# EAGLE board Arduino Shield Circuit v13 (EAGLE 9.7.0)
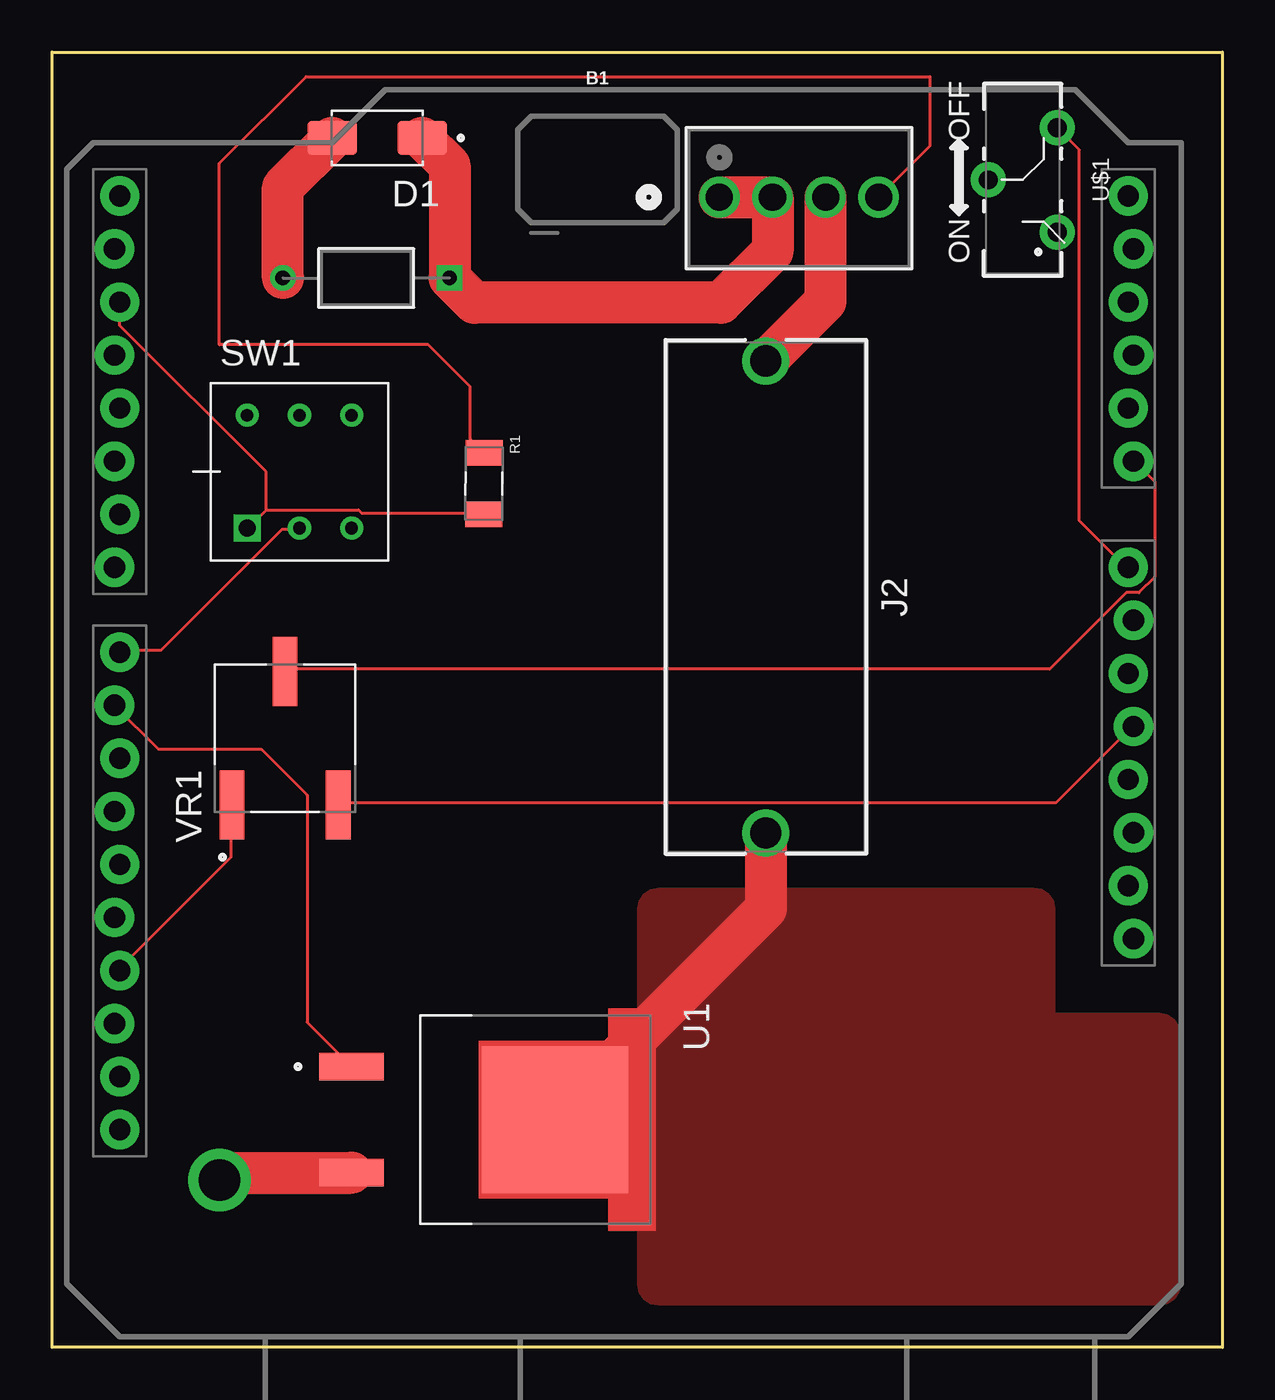
[diagram p0: board, top side]
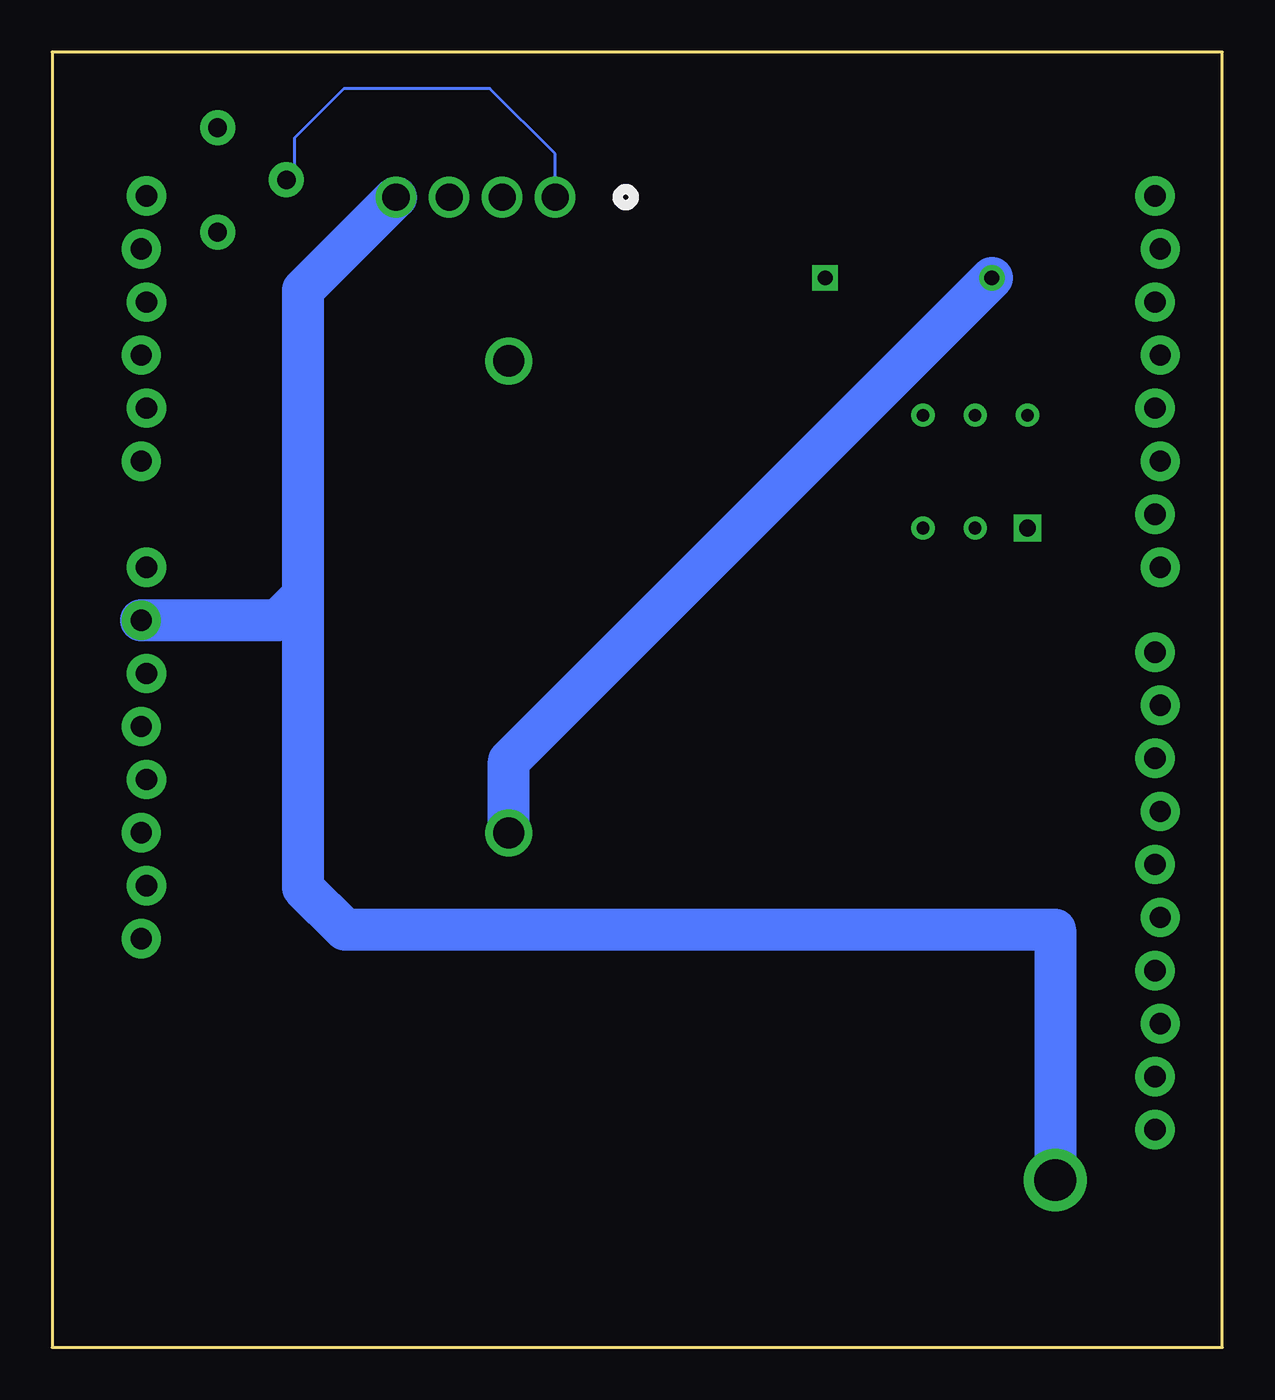
[diagram p1: board, bottom side, seen from below]

Size 56 x 62 mm. Coordinates in mm from the lower left corner, seen from the top.
Outline: 0,62 56,62 56,0 0,0 0,62
Copper layers (1*16): Top / Bottom
Stack-up Default Layer Stack: Top User Defined 0.035mm / Dielectric-1 User Defined 1.5mm / Bottom User Defined 0.035mm
Design rules: minimum copper width 6mil, minimum drill size 0.35mm, copper clearance wire_polygon to wire_polygon 6mil, copper clearance wire_polygon to pad_smd 6mil, copper clearance wire_polygon to via 6mil, copper clearance pad_smd to pad_smd 6mil, copper clearance pad_smd to via 6mil, copper clearance via to via 6mil, copper clearance smd to pad (same net) 6mil, copper clearance smd to via (same net) 6mil, copper clearance smd to smd (same net) 6mil, dimension clearance 40mil, restrict clearance 0mil, drill distance 6mil, keepout clearance 0mil

## Footprints (pad centres in the part's own frame; a part is rotated, then mirrored left to right if it is on the bottom)
UNO_R3_SHIELD_NOLABELS_LOCK = drill 1.016 pad 1.88: 3.3V 24.13,-3.81; 5V 24.384,-1.27; A0 24.384,11.43; A1 24.13,13.97; A2 24.384,16.51; A3 24.13,19.05; A4 24.384,21.59; A5 24.13,24.13; AREF -24.384,-15.494; D2 -24.13,19.05; D3 -24.384,16.51; D4 -24.13,13.97; D5 -24.384,11.43; D6 -24.13,8.89; D7 -24.384,6.35; D8 -24.13,2.286; D9 -24.384,-0.254; D10 -24.13,-2.794; D11 -24.384,-5.334; D12 -24.13,-7.874; D13 -24.384,-10.414; GND@0 24.13,1.27; GND@1 24.384,3.81; GND@2 -24.13,-12.954; IOREF 24.13,-8.89; NC 24.384,-11.43; RES 24.384,-6.35; RX -24.13,24.13; SCL -24.13,-20.574; SDA -24.13,-18.034; TX -24.384,21.59; VIN 24.13,6.35
CAP_SA10_AVX = drill 0.711 pad 1.219 square: 1 0,0 | drill 0.711 pad 1.219: 2 7.976,0
DIOM5226X295N = smd 2.36 x 1.61: A 2.155,0; C -2.155,0
696108003002 = drill 1.5: 1 -11.3,0; 2 11.3,0
CONN_OSTVN04A150_OST = drill 1.295 pad 1.803: 1 0,0; 2 2.54,0; 3 5.08,0; 4 7.62,0
RESC3216X70N = smd 1.23 x 1.77: 1 -1.466,0; 2 1.466,0
TL2201EEZB = drill 0.8 square: P$1 -2.5,-2.7 | drill 0.6: P$2 0,-2.7; P$3 2.5,-2.7; P$4 -2.5,2.7; P$5 0,2.7; P$6 2.5,2.7
TRANS_PSMN4R8-100BSE = smd 1.3 x 3.1: 1 -2.54,-6.4; 3 2.54,-6.4 | smd 7 x 7: 2 0,3.335
CL-SB-12C-01 = drill 0.9 pad 1.676: 1 2.5,1.65; 2 0,-1.65; 3 -2.5,1.65
TRIM_3361P-1-103GLF = smd 3.3 x 1.19: 1 -3.2,2.54; 2 3.2,0; 3 -3.2,-2.54

## Placement (x,y rotation side)
B1  ARDUINO_UNO_R3_SHIELDUNO_R3_SHIELD_NOLABELS_LOCK  [UNO_R3_SHIELD_NOLABELS_LOCK]  27.36,30.99 0 top
C1  SA105E503ZAACAP_SA10_AVX  [CAP_SA10_AVX]  19.01,51.19 180 top
D1  S1GTR  [DIOM5226X295N]  15.55,57.89 180 top
J2  696108003002  [696108003002]  34.15,35.92 270 top
J3  OSTVN04A150CONN_OSTVN04A150_OST  [CONN_OSTVN04A150_OST]  31.93,55.06 0 top
R1  RMCF1206JT10K0  [RESC3216X70N]  20.66,41.35 269.6 top
SW1  TL2201EEZB  [TL2201EEZB]  11.83,41.92 0 top
U1  PHB32N06LT,118  [TRANS_PSMN4R8-100BSE]  20.72,10.9 270 top
U$1  CL-SB-12C-01  [CL-SB-12C-01]  46.44,55.89 270 top
VR1  3361P-1-103GLF  [TRIM_3361P-1-103GLF]  11.14,29.16 90 top

## Library data of the parts
B1 = SparkFun-Boards
C1 = 2024-02-19_13-40-10_Library; COPYRIGHT: Copyright (C) 2024 Ultra Librarian. All rights reserved.; MANUFACTURER_PART_NUMBER: SA105E503ZAA; MFR_NAME: KYOCERA AVX
D1 = Diode_S1GTR; CHECK_PRICES: https://www.snapeda.com/parts/S1GTR/SMC+Diode+Solutions/view-part/?ref=eda; DESCRIPTION: Diode Standard 400 V 1A Surface Mount SMA (DO-214AC); MF: SMC Diode Solutions; MP: S1GTR; PACKAGE: DO-214AC-214 Panjit; SNAPEDA_LINK: https://www.snapeda.com/parts/S1GTR/SMC+Diode+Solutions/view-part/?ref=snap
J2 = Eagle_WR-FSH (rev20a); DATASHEET-URL: https://www.we-online.com/catalog/datasheet/696108003002.pdf; IR-UL: 20A; IR-VDE: 6.3A; MATES: 696122003001; PART-NUMBER: 696108003002
J3 = 2024-02-20_01-06-15_Library; COPYRIGHT: Copyright (C) 2024 Ultra Librarian. All rights reserved.; MANUFACTURER_PART_NUMBER: OSTVN04A150; MFR_NAME: On Shore Technology
R1 = R10k_RMCF1206JT10K0; CHECK_PRICES: https://www.snapeda.com/parts/RMCF1206JT10K0/Stackpole+Electronics+Inc/view-part/?ref=eda; DESCRIPTION: 10 kOhms ±5% 0.25W, 1/4W Chip Resistor 1206 (3216 Metric) Automotive AEC-Q200 Thick Film; DIGIKEY_PART_NUMBER: RMCF1206JT10K0TR-ND; MF: Stackpole Electronics Inc; MP: RMCF1206JT10K0; PACKAGE: 3216 Stackpole; PURCHASE-URL: https://www.snapeda.com/api/url_track_click_mouser/?unipart_id=3955175&manufacturer=Stackpole Electronics Inc&part_name=RMCF1206JT10K0&search_term=rmcf1206jt10k0; SNAPEDA_LINK: https://www.snapeda.com/parts/RMCF1206JT10K0/Stackpole+Electronics+Inc/view-part/?ref=snap
SW1 = SwitchPB_TL2201EEZB; AVAILABILITY: In Stock; CHECK_PRICES: https://www.snapeda.com/parts/TL2201EEZB/E-Switch/view-part/?ref=eda; DESCRIPTION: Pushbutton Switch, TL2201, DPDT, ON-ON, Plunger for Cap, 100mA, 30VDC,PC Pin | E-Switch TL2201EEZB; MF: E-Switch; MP: TL2201EEZB; PACKAGE: None; PRICE: None; PURCHASE-URL: https://www.snapeda.com/api/url_track_click_mouser/?unipart_id=5162943&manufacturer=E-Switch&part_name=TL2201EEZB&search_term=tl2201; SNAPEDA_LINK: https://www.snapeda.com/parts/TL2201EEZB/E-Switch/view-part/?ref=snap
U1 = MOS_PHB32N06LT_118; AVAILABILITY: In Stock; CHECK_PRICES: https://www.snapeda.com/parts/PHB32N06LT,118/Nexperia/view-part/?ref=eda; DESCRIPTION: PHB32N06LT series 60V 34A 0.037 Ohm N-ch D2PAK Mosfet; MF: Nexperia; MP: PHB32N06LT,118; PACKAGE: D2PAK-3 Nexperia USA Inc.; PRICE: None; PURCHASE-URL: https://www.snapeda.com/api/url_track_click_mouser/?unipart_id=2597977&manufacturer=Nexperia&part_name=PHB32N06LT,118&search_term=None; SNAPEDA_LINK: https://www.snapeda.com/parts/PHB32N06LT,118/Nexperia/view-part/?ref=snap
U$1 = Switch_CL-SB-12C-01; CHECK_PRICES: https://www.snapeda.com/parts/CL-SB-12C-01/NIC+Components/view-part/?ref=eda; DESCRIPTION: Slide Switch, SPDT, 200mA, 12V, Standard, Through Hole, CL-SB Series | Nidec Components CL-SB-12C-01; MF: nidec components; MP: CL-SB-12C-01; PACKAGE: None; PURCHASE-URL: https://www.snapeda.com/api/url_track_click_mouser/?unipart_id=13603114&manufacturer=nidec components&part_name=CL-SB-12C-01&search_term=cl-sb-12c-01; SNAPEDA_LINK: https://www.snapeda.com/parts/CL-SB-12C-01/NIC+Components/view-part/?ref=snap
VR1 = Pot_3361P-1-103GLF; CHECK_PRICES: https://www.snapeda.com/parts/3361P-1-103GLF/Bourns/view-part/?ref=eda; DESCRIPTION: Trimmer,Cermet,Rest 10 Kilohms,SMD,1 Turn,Pwr-Rtg 0.5W | Bourns 3361P-1-103GLF; MF: Bourns; MP: 3361P-1-103GLF; PACKAGE: 3361P Bourns; RS_COMPONENTS_70153635_PURCHASE_URL: https://www.snapeda.com/api/url_track_click/https%253A//us.rs-online.com/product/bourns/3361p-1-103glf/70153635/%253Futm_source%253DSnapEDA%2526utm_medium%253Dpart_sourcing%2526utm_campaign%253Dpartsourcing_SnapEDA_IMP_EX_GR/?unipart_id=105123&manufacturer=Bourns&part_name=3361P-1-103GLF&search_term=3361p-1-103glf; SNAPEDA_LINK: https://www.snapeda.com/parts/3361P-1-103GLF/Bourns/view-part/?ref=snap

## Nets
GND: B1.GND@1 J3.4 R1.1 U1.3
N$2: C1.2 D1.A J2.2 U1.2
N$3: B1.TX
N$4: B1.A0 VR1.2
N$5: B1.D8 SW1.P$2
N$6: B1.GND@2 VR1.1
N$7: B1.D2 R1.2 SW1.P$1
N$8: B1.RX
N$9: C1.1 D1.C J3.1 J3.2 U$1.2
N$10: B1.5V VR1.3
N$11: B1.VIN U$1.3
N$12: B1.D9 U1.1
N$13: J2.1 J3.3

## Tracks (layer width: path | path; a pad name or v marks a point on that pad's centre or on a via)
GND  (via drill 2 pad 2.5)
  Top 0.152: R1.1 20,43.49 20,46 18,48 8,48 8,56.69 12.15,60.83 42,60.83 42,57.51 J3.4
  Top 2: v8,8 8.36,8.36 U1.3
  Bottom 0.152: 39.64,55.02 J3.4
  Bottom 2: J3.4 44,50.61 44,36 | 44,36 45.2,34.8 B1.GND@1 | 44,36 44,22 42,20 8,20 v8,8
N$2
  Top 0.152: U1.2 23.98,10.82
  Top 2: J2.2 34.15,20.99 23.98,10.82 | D1.A 11.04,55.53 C1.2
  Bottom 2: C1.2 34.15,28.08 J2.2
  pour Top (no thermals): 28,22 48,22 48,16 54,16 54,2 28,2
N$4
  Top 0.152: VR1.2 11.16,32.46 47.73,32.46 51.39,36.12 52,36.12 52.76,36.88 52.76,41.45 51.85,42.37 B1.A0
N$5
  Top 0.152: SW1.P$2 11.76,39.17 11,39.17 5.21,33.38 3.23,33.38 B1.D8
N$6
  Top 0.152: VR1.1 8.56,25.91 8.56,23.47 3.23,18.14 B1.GND@2
N$7
  Top 0.152: 10.24,40.08 14.66,40.08 14.81,39.93 20.6,39.93 R1.2 | 10.24,40.08 9.48,39.32 SW1.P$1 | B1.D2 3.23,48.92 10.24,41.91 10.24,40.08
N$9
  Top 2: D1.C 19.01,56.58 C1.1 20.2,50 32,50 34.47,52.47 J3.2 J3.1
  Bottom 0.152: J3.1 31.93,57.14 35.05,60.26 42.05,60.26 44.42,57.89 44.42,56.26 U$1.2
N$10
  Top 0.152: VR1.3 13.75,26.06 48.04,26.06 51.69,29.72 B1.5V
N$11
  Top 0.152: B1.VIN 51.39,37.34 49.16,39.57 49.16,57.32 U$1.3
N$12
  Top 0.152: B1.D9 5.08,28.63 10,28.63 12.2,26.43 12.2,15.56 U1.1
N$13
  Top 2: J2.1 37.01,50.08 J3.3